# Altium PCB Delibird.PcbDoc
Units mm, origin at the board's own origin, x right, y up, seen from the top; angles counter-clockwise.
Board outline 44.14 x 25.42 mm, 2 copper layers (Top Layer, Bottom Layer); 13 components, 18 nets, 76 pads, 16 vias.
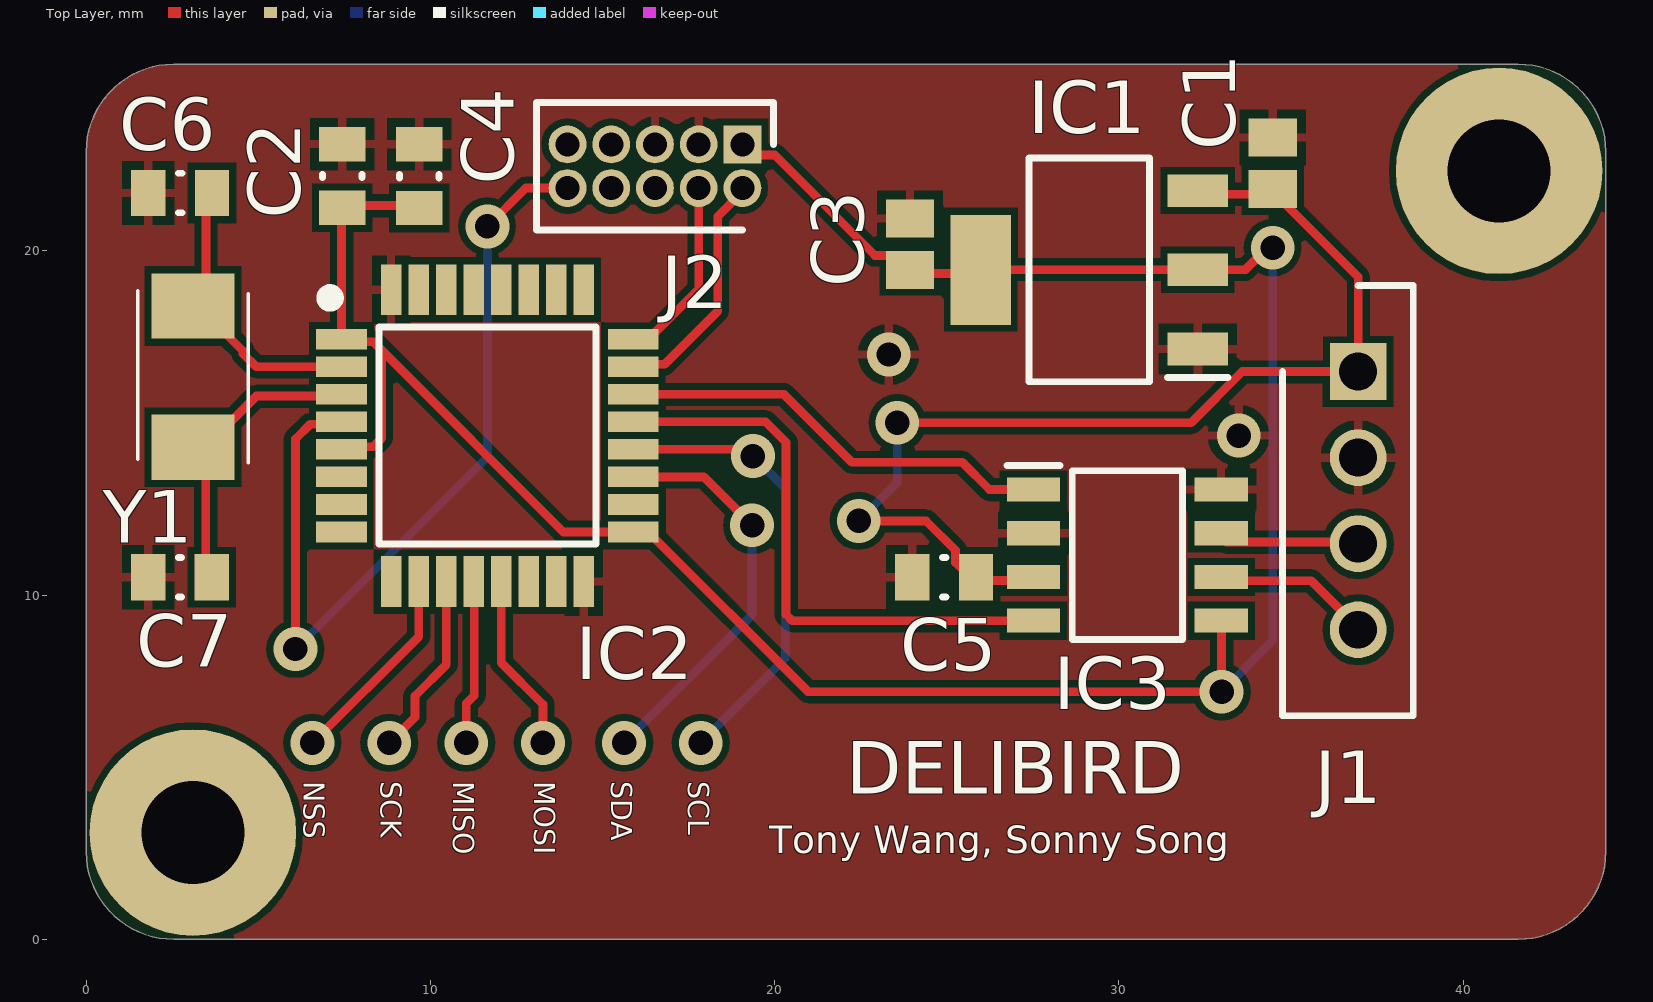
[diagram p0: Top Layer view]
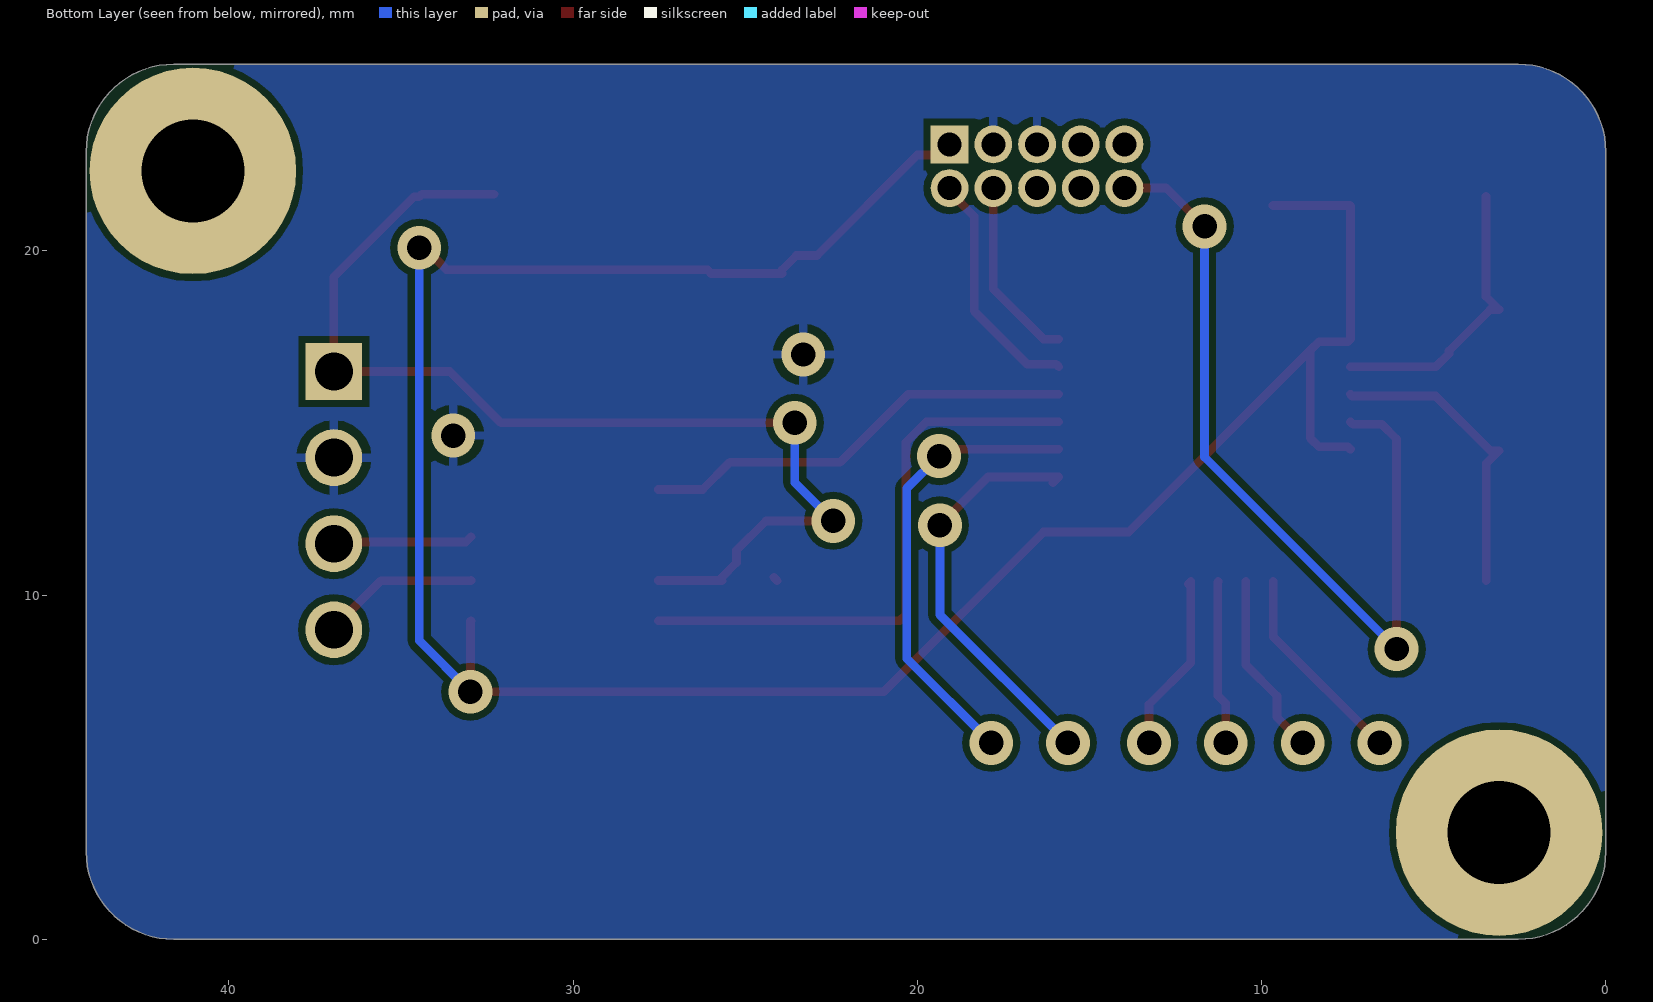
[diagram p1: Bottom Layer view, seen from below]
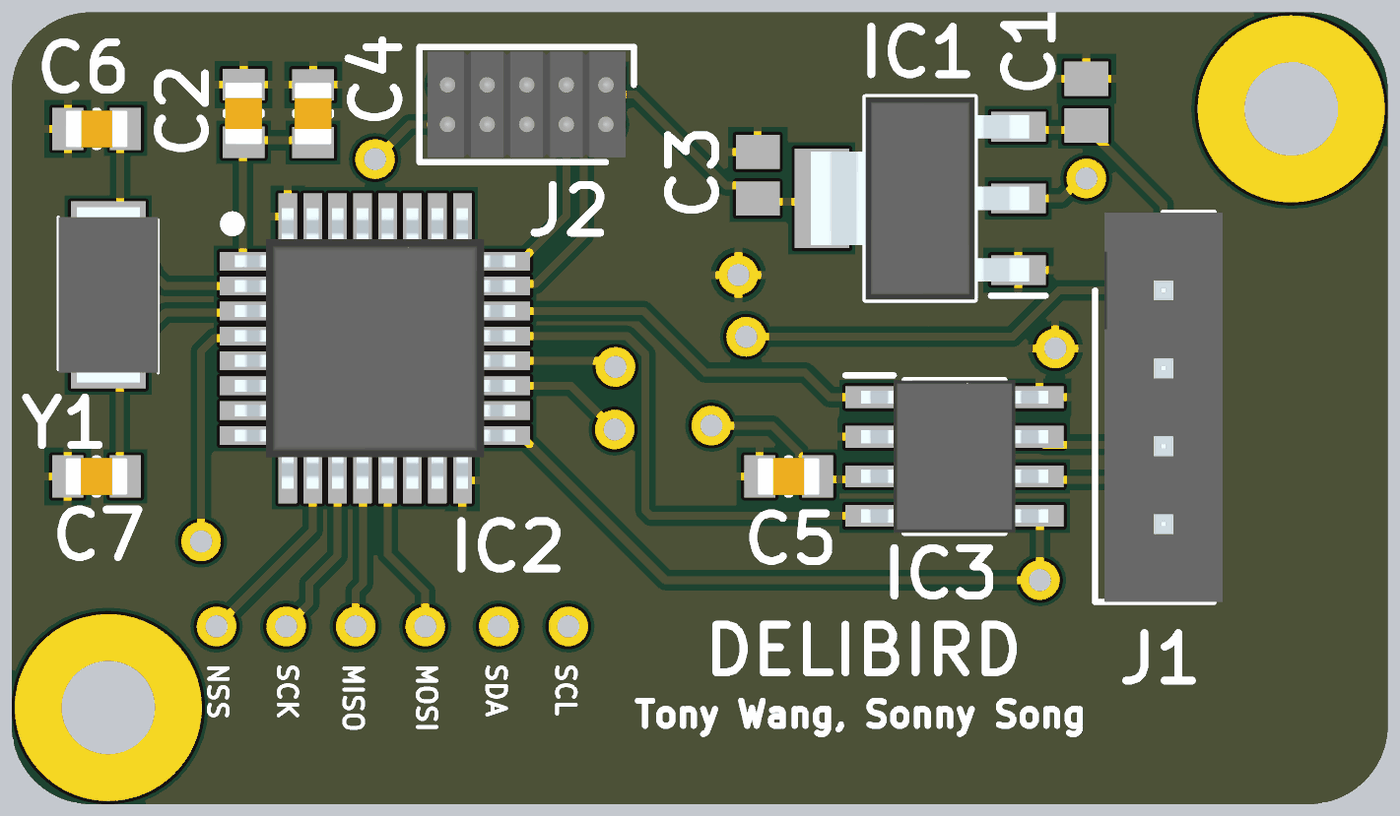
[diagram p2: 3D render of the assembled board from above, using the file's embedded part models]

## Layer stack, top to bottom
Top Solder: solder mask 0.0102, Solder Resist, Dk 3.5
Top Layer: signal copper 0.0356
Dielectric 1: dielectric 0.32, FR-4, Dk 4.8
Bottom Layer: signal copper 0.0356
Bottom Solder: solder mask 0.0102, Solder Resist, Dk 3.5

## Board outline
2.54,0 cw(c2.54,2.54) 0,2.54 0,22.88 cw(c2.54,22.88) 2.54,25.42 41.604,25.42 cw(c41.604,22.88) 44.144,22.88 44.144,2.54 cw(c41.604,2.54) 41.604,0

## Design rules (kind name [scope] priority, off if disabled: settings)
Clearance [All] p1: gap=0.2 ignorepadtopadclearanceinfootprint=TRUE except(0.15: Fill-Text Poly-Text Region-Text)
DiffPairsRouting [All] p1: maxlimit=0.254 minlimit=0.254 mostfreqgap=0.254 substack1={6880419E-5F7E-40DC-B808-49A93CB59D2A} toplayer_{6880419e-5f7e-40dc-b808-49a93cb59d2a}_minwidth=0.381 toplayer_{6880419e-5f7e-40dc-b808-49a93cb59d2a}_maxwidth=0.381 toplayer_{6880419e-5f7e-40dc-b808-49a93cb59d2a}_prefwidth=0.381 bottomlayer_{6880419e-5f7e-40dc-b808-49a93cb59d2a}_minwidth=0.381 bottomlayer_{6880419e-5f7e-40dc-b808-49a93cb59d2a}_maxwidth=0.381 bottomlayer_{6880419e-5f7e-40dc-b808-49a93cb59d2a}_prefwidth=0.381 toplayer_minwidth=0.381 toplayer_maxwidth=0.381 toplayer_prefwidth=0.381 bottomlayer_minwidth=0.381 bottomlayer_maxwidth=0.381 bottomlayer_prefwidth=0.381 maxuncoupledlength=12.7
MinimumSolderMaskSliver [All] p1: minsoldermaskwidth=0.196
PolygonConnect [All] p1: connectstyle=Relief reliefconductorwidth=0.254 reliefentries=4 polygonreliefangle="90 Angle" airgapwidth=0.254
RoutingVias [All] p1: holewidth=0.711 width=1.27 viastyle="Through Hole" minholewidth=0.711 minwidth=1.27 maxholewidth=0.711 maxwidth=1.27
SilkToSolderMaskClearance [IsPad] p1: minsilkscreentomaskgap=0.15 clearancetoexposedcopper=TRUE
SolderMaskExpansion [All] p1: expansion=0.102 istentingtop=FALSE
Width [All] p1: maxlimit=0.254 minlimit=0.254 preferedwidth=0.254 substack1={6880419E-5F7E-40DC-B808-49A93CB59D2A}
27 further rules are at their usual default settings.

## Components (designator, comment, footprint, x,y, rotation, side; value= is the part's Value field where it differs from the comment)
C1 "Cap2" C0805 34.472,22.542 r90 top value=10uF
C2 "Capacitor - Nonpolarized" "0805 - Capacitor" 7.44,22.176 r90 top value=10nF
C3 "Cap2" C0805 23.932,20.192 r90 top value=100uF
C4 "Capacitor - Nonpolarized" "0805 - Capacitor" 9.672,22.17 r90 top value=1uF
C5 "Capacitor - Nonpolarized" "0805 - Capacitor" 24.924,10.52 r180 top value=100nF
C6 "Capacitor - Nonpolarized" "0805 - Capacitor" 2.728,21.68 r0 top value=4pF
C7 "Capacitor - Nonpolarized" "0805 - Capacitor" 2.722,10.52 r0 top value=4pF
IC1 "TLV1117-33IDCYR" SOT230P700X180-4N 29.14,19.448 r180 top
IC2 "STM32F042K4T6" QFP80P900X900X160-32N 11.656,14.632 r0 top
IC3 "TJA1051T_3,118" SOIC127P600X175-8N 30.244,11.16 r0 top
J1 "B4B-EH-A__LF___SN_" SHDR4W64P0X250_1X4_1250X380X600P 36.952,16.492 r270 top
J2 "GRPB052VWVN-RC" HDRV10W50P127_2X5_635X340X430P 19.062,23.094 r180 top
Y1 "Oscillator" CX5032GB08000H0HPQZ1 3.1,16.348 r90 top value=8MHz

## Footprints (in the part's own frame and the unit in brackets; to place one, negate y for a bottom-side part, rotate by r counter-clockwise, add the part's x,y. Pads: shape width x height; smd on the part's side, far side on the other; paste and mask are expansions set on the pad)
"0805 - Capacitor" [mm] "0805 Chip Capacitor - IPC Medium Density"
  rect 1x1.35 smd: 1(-0.925,0) 2(0.925,0)
  silkscreen extent -0.05,-0.58 0.05,0.58, body extent -1,-0.6 1,0.6, height 1.2
C0805 [mm] "Chip Capacitor, Body 2.0x1.3mm, IPC High Density"
  rect 1.1x1.4 smd: 1(-0.75,0) 2(0.75,0)
  body extent -1.1,-0.72 1.1,0.72, height 1.4
CX5032GB08000H0HPQZ1 [mm]
  rect 1.9x2.4 smd: 1(-2.05,0) 2(2.05,0)
  silkscreen extent -2.5,-1.6 2.5,1.6, body extent -2.81,-1.6 2.81,1.6, height 1.2
HDRV10W50P127_2X5_635X340X430P [mm]
  rect 1.1x1.1 hole 0.7: 1(0,0)
  round 1.1 hole 0.7: 2(0,1.27) 3(1.27,0) 4(1.27,1.27) 5(2.54,0) 6(2.54,1.27) 7(3.81,0) 8(3.81,1.27) 9(5.08,0) 10(5.08,1.27)
  silkscreen extent -0.9,-1.21 5.98,2.48, body extent -0.64,-1.06 5.71,2.33, height 4.3
QFP80P900X900X160-32N [mm]
  rect 1.475x0.6 smd: 1(-4.238,2.8) 2(-4.238,2) 3(-4.238,1.2) 4(-4.238,0.4) 5(-4.238,-0.4) 6(-4.238,-1.2) 7(-4.238,-2) 8(-4.238,-2.8) 17(4.238,-2.8) 18(4.238,-2) 19(4.238,-1.2) 20(4.238,-0.4) 21(4.238,0.4) 22(4.238,1.2) 23(4.238,2) 24(4.238,2.8)
  rect 0.6x1.475 smd: 9(-2.8,-4.238) 10(-2,-4.238) 11(-1.2,-4.238) 12(-0.4,-4.238) 13(0.4,-4.238) 14(1.2,-4.238) 15(2,-4.238) 16(2.8,-4.238) 25(2.8,4.238) 26(2,4.238) 27(1.2,4.238) 28(0.4,4.238) 29(-0.4,4.238) 30(-1.2,4.238) 31(-2,4.238) 32(-2.8,4.238)
  silkscreen extent -4.77,-3.15 3.15,4.2, body extent -4.5,-4.5 4.5,4.5, height 1.6
SHDR4W64P0X250_1X4_1250X380X600P [mm]
  rect 1.65x1.65 hole 1.1: 1(0,0)
  round 1.65 hole 1.1: 2(2.5,0) 3(5,0) 4(7.5,0)
  silkscreen extent -2.5,-2.2 10,1.6, body extent -2.5,-1.9 10,1.9, height 6
SOIC127P600X175-8N [mm]
  rect 1.55x0.7 smd: 1(-2.725,1.905) 2(-2.725,0.635) 3(-2.725,-0.635) 4(-2.725,-1.905) 5(2.725,-1.905) 6(2.725,-0.635) 7(2.725,0.635) 8(2.725,1.905)
  silkscreen extent -3.5,-2.45 1.6,2.61, body extent -3,-2.45 3,2.45, height 1.75
SOT230P700X180-4N [mm]
  rect 1.75x0.95 smd: 1(-3.15,2.3) 2(-3.15,0) 3(-3.15,-2.3)
  rect 1.75x3.2 smd: 4(3.15,0)
  silkscreen extent -4.03,-3.25 1.75,3.25, body extent -3.5,-3.25 3.5,3.25, height 1.8

## Part data
C1 C3: "Capacitor", PackageDescription="Capacitor; 2 Leads", PackageReference=CAPR5-4X5, Published=23-Sep-2002, Publisher="Altium Limited"
C2 C4 C5 C6 C7: "Nonpolarized Capacitor"
IC1: library part TLV1117-33CDCYR, "Integrated Circuit", Manufacturer_Name="Texas Instruments", Mouser Part Number=595-TLV1117-33CDCYR, Arrow Part Number=TLV1117-33CDCYR, Arrow Price/Stock=https://www.arrow.com/en/products/tlv1117-33cdcyr/texas-instruments, Datasheet Link=http://www.ti.com/lit/gpn/tlv1117, Height=1.8mm, Manufacturer_Part_Number=TLV1117-33CDCYR, Mouser Price/Stock=https://www.mouser.co.uk/ProductDetail/Texas-Instruments/TLV1117-33CDCYR?qs=p6lVfQR1GSoiRKz8KGIbKg%3D%3D
IC2: "Integrated Circuit", Manufacturer_Name=STMicroelectronics, Mouser Part Number=511-STM32F042K4T6, Arrow Part Number=STM32F042K4T6, Arrow Price/Stock=https://www.arrow.com/en/products/stm32f042k4t6/stmicroelectronics, Datasheet Link=https://www.mouser.com/datasheet/2/389/stm32f042c4-956225.pdf, Height=1.6mm, Manufacturer_Part_Number=STM32F042K4T6, Mouser Price/Stock=https://www.mouser.co.uk/ProductDetail/STMicroelectronics/STM32F042K4T6?qs=ClYTdQWm4hDAfZj5dd9NhA%3D%3D
IC3: "Integrated Circuit", Arrow Part Number=TJA1051T/3,118, Manufacturer_Name=NXP, Mouser Part Number=771-TJA1051T3118, Arrow Price/Stock=https://www.arrow.com/en/products/tja1051t3118/nxp-semiconductors, Datasheet Link=http://www.nxp.com/docs/en/data-sheet/TJA1051.pdf, Height=1.75mm, Manufacturer_Part_Number=TJA1051T/3,118, Mouser Price/Stock=https://www.mouser.co.uk/ProductDetail/NXP-Semiconductors/TJA1051T-3118?qs=O%2F7ihdSJpebv1PFlp05wnQ%3D%3D
J1: "Connector", Arrow Part Number="B4B-EH-A (LF) (SN)", Manufacturer_Name="JST (JAPAN SOLDERLESS TERMINALS)", Datasheet Link=http://www.jst-mfg.com/product/pdf/eng/eEH.pdf, Height=6mm, Manufacturer_Part_Number="B4B-EH-A (LF) (SN)"
J2: "Connector", Manufacturer_Name=Sullins, Arrow Part Number=GRPB052VWVN-RC, Datasheet Link=https://media.digikey.com/pdf/Data%20Sheets/Sullins%20PDFs/GRPB_%20_2VWVN-RC%2010954-C.pdf, Height=4.3mm, Manufacturer_Part_Number=GRPB052VWVN-RC
Y1: "Crystal Oscillator", Manufacturer=CX5032GB08000H0HPQZ1

## Free pads (board coordinates)
  round 6 hole 3: MOUNT1(41.044,22.32) MOUNT2(3.1,3.1)

## Via types
v1: diameter 1.27, hole 0.711, Top Layer to Bottom Layer, 16 vias

## Nets (pads, with @x,y where several pads share a name; then routed paths per layer and width w, separated by ;. In a path a pad name is that pad's centre, name@x,y a point inside that pad or via, vN(x,y) a via of type N, cw(c..) or ccw(c..) an arc to the next point about the centre after c; other vN are vias at no path point)
+3.3V: C2.1 C3.1 C4.1 IC1.2 IC1.4 IC2.1 IC2.5 IC2.17 IC3.5 J2.1 | length 72.6
  Top Layer w0.254: IC2.5 7.491,14.305 8.332,14.305 8.583,14.555 8.583,17.109 ; C4.1@9.672,21.316 7.446,21.316 7.44,21.322 7.418,21.3 IC2.1 7.491,17.359 8.332,17.359 8.583,17.109 ; J2.1 19.373,22.783 19.997,22.783 22.915,19.865 23.509,19.865 C3.1 ; C3.1@23.932,19.338 25.984,19.338 26.094,19.448 IC1.2 33.675,19.448 34.315,20.088 v1(34.472,20.088) ; IC3.5 32.984,9.24 v1(32.984,7.192) 20.972,7.192 16.332,11.832 IC2.17 13.859,11.832 8.583,17.109
  Bottom Layer w0.254: v1(32.984,7.192) 34.472,8.68 v1(34.472,20.088)
+5V: C1.1 C5.1 IC1.3 IC3.3 J1.1 | length 31.7
  Top Layer w0.254: v1(22.444,12.152) 24.396,12.152 25.251,11.297 25.251,10.943 C5.1@25.674,10.52 ; v1(23.56,15.004) 32.1,15.004 33.588,16.492 J1.1 36.952,19.24 34.622,21.57 34.472,21.57 34.398,21.644 IC1.3@32.29,21.644 ; C5.1@25.674,10.416 25.679,10.421 IC3.3@27.519,10.421
  Bottom Layer w0.254: v1(22.444,12.152) 23.56,13.268 v1(23.56,15.004)
CANH: IC3.7 J1.3 | length 4.1
  Top Layer w0.254: IC3.7@32.969,11.691 33.121,11.54 36.801,11.54 J1.3@36.952,11.388
CANL: IC3.6 J1.4 | length 4.7
  Top Layer w0.254: IC3.6@32.969,10.421 32.974,10.416 35.588,10.416 36.952,9.052 J1.4@36.952,8.888
CANRX: IC2.21 IC3.4 | length 16.9
  Top Layer w0.254: IC2.21 19.733,15.032 20.33,14.435 20.33,9.433 20.509,9.255 IC3.4
CANTX: IC2.22 IC3.1 | length 12.8
  Top Layer w0.254: IC2.22 20.268,15.832 22.242,13.858 25.446,13.858 26.239,13.065 IC3.1
GND: C1.2 C2.2 C3.2 C4.2 C5.2 C6.1 C7.1 IC1.1 IC2.16 IC2.32 IC3.2 IC3.8 J1.2 J2.3 J2.5 | length 0.1
  Top Layer w0.254: C5.2@24.07,10.416 C5.2@24.174,10.52
  other v1: 33.48,14.632 23.312,16.988
MISO: IC2.12 | length 4.8
  Top Layer w0.254: v1(11.036,5.704) 11.036,6.848 11.27,7.082 11.27,10.38 IC2.12
MOSI: IC2.13 | length 5.3
  Top Layer w0.254: IC2.13@12.129,10.321 IC2.13 12.056,8.032 13.268,6.82 v1(13.268,5.704)
NetC6_2: C6.2 IC2.2 Y1.2 | length 8.5
  Top Layer w0.254: C6.2@3.478,21.576 3.478,18.672 3.1,18.294 3.35,18.294 4.554,17.09 4.554,17.013 4.935,16.632 IC2.2
NetC7_2: C7.2 IC2.3 Y1.1 | length 8.9
  Top Layer w0.254: C7.2@3.472,10.416 3.472,13.822 3.1,14.194 3.35,14.194 4.935,15.779 7.365,15.779 IC2.3
NRESET: IC2.4 J2.10 | length 25
  Top Layer w0.254: v1(6.076,8.432) 6.076,14.531 6.504,14.959 7.345,14.959 IC2.4 ; v1(11.656,20.708) 12.772,21.824 J2.10
  Bottom Layer w0.254: v1(6.076,8.432) 11.656,14.012 v1(11.656,20.708)
NSS: IC2.10 | length 6
  Top Layer w0.254: v1(6.572,5.704) 9.656,8.788 IC2.10
SCK: IC2.11 | length 5.4
  Top Layer w0.254: v1(8.804,5.704) 9.548,6.448 9.548,7.068 10.456,7.976 IC2.11
SCL: IC2.20 | length 13.3
  Top Layer w0.254: IC2.20 18.898,14.232 19.094,14.036 v1(19.368,14.036)
  Bottom Layer w0.254: v1(17.856,5.704) 20.306,8.154 20.306,13.099 v1(19.368,14.036)
SDA: IC2.19 | length 12.1
  Top Layer w0.254: IC2.19@16.067,13.259 IC2.19 17.94,13.432 v1(19.344,12.028)
  Bottom Layer w0.254: v1(15.624,5.704) 19.344,9.424 v1(19.344,12.028)
SWCLK: IC2.24 J2.4 | length 5.4
  Top Layer w0.254: IC2.24 16.332,17.432 17.792,18.892 J2.4
SWDIO: IC2.23 J2.2 | length 7
  Top Layer w0.254: IC2.23 15.967,16.705 16.808,16.705 18.346,18.243 18.346,20.996 19.062,21.712 J2.2
pads on no net: IC2.6 IC2.7 IC2.8 IC2.9 IC2.14 IC2.15 IC2.18 IC2.25 IC2.26 IC2.27 IC2.28 IC2.29 IC2.30 IC2.31 J2.6 J2.7 J2.8 J2.9

## Polygon pours and split planes (outlines as drawn)
GND on Bottom Layer "GND_L02_P007" (solid, pour order 7): 2.54,0 cw(c2.54,2.54) 0,2.54 0,22.88 cw(c2.54,22.88) 2.54,25.42 41.604,25.42 cw(c41.604,22.88) 44.144,22.88 44.144,2.54 cw(c41.604,2.54) 41.604,0
GND on Top Layer "GND_L01_P006" (solid, pour order 6): 2.54,0 cw(c2.54,2.54) 0,2.54 0,22.88 cw(c2.54,22.88) 2.54,25.42 41.604,25.42 cw(c41.604,22.88) 44.144,22.88 44.144,2.54 cw(c41.604,2.54) 41.604,0

## Silkscreen, mask and mechanical layers (free items; w line width, h text height)
Top Overlay:
  text "NSS" at 6.325,4.587 h0.6 r270
  text "SCK" at 8.557,4.587 h0.6 r270
  text "MISO" at 10.665,4.587 h0.6 r270
  text "MOSI" at 13.021,4.587 h0.6 r270
  text "SDA" at 15.253,4.587 h0.6 r270
  text "SCL" at 17.485,4.587 h0.6 r270
  text "DELIBIRD" at 22.078,4.222 h1.52
  text "Tony Wang, Sonny Song" at 19.846,2.505 h0.8
Mechanical 1:
  lines w0.025: -0.013,2.54 ccw(c2.54,2.54) 2.54,-0.013 37.592,-0.013 ccw(c37.592,2.54) 40.145,2.54 40.145,22.86 ccw(c37.592,22.86) 37.592,25.413 2.54,25.413 ccw(c2.54,22.86) -0.013,22.86 -0.013,2.54